# Altium PCB Simon Says.PcbDoc
Units mil, origin at the board's own origin, x right, y up, seen from the top; angles counter-clockwise.
Board outline 3149.61 x 1929.13 mil, 2 copper layers (Top Layer, Bottom Layer); 14 components, 13 nets, 74 pads, 1 vias.
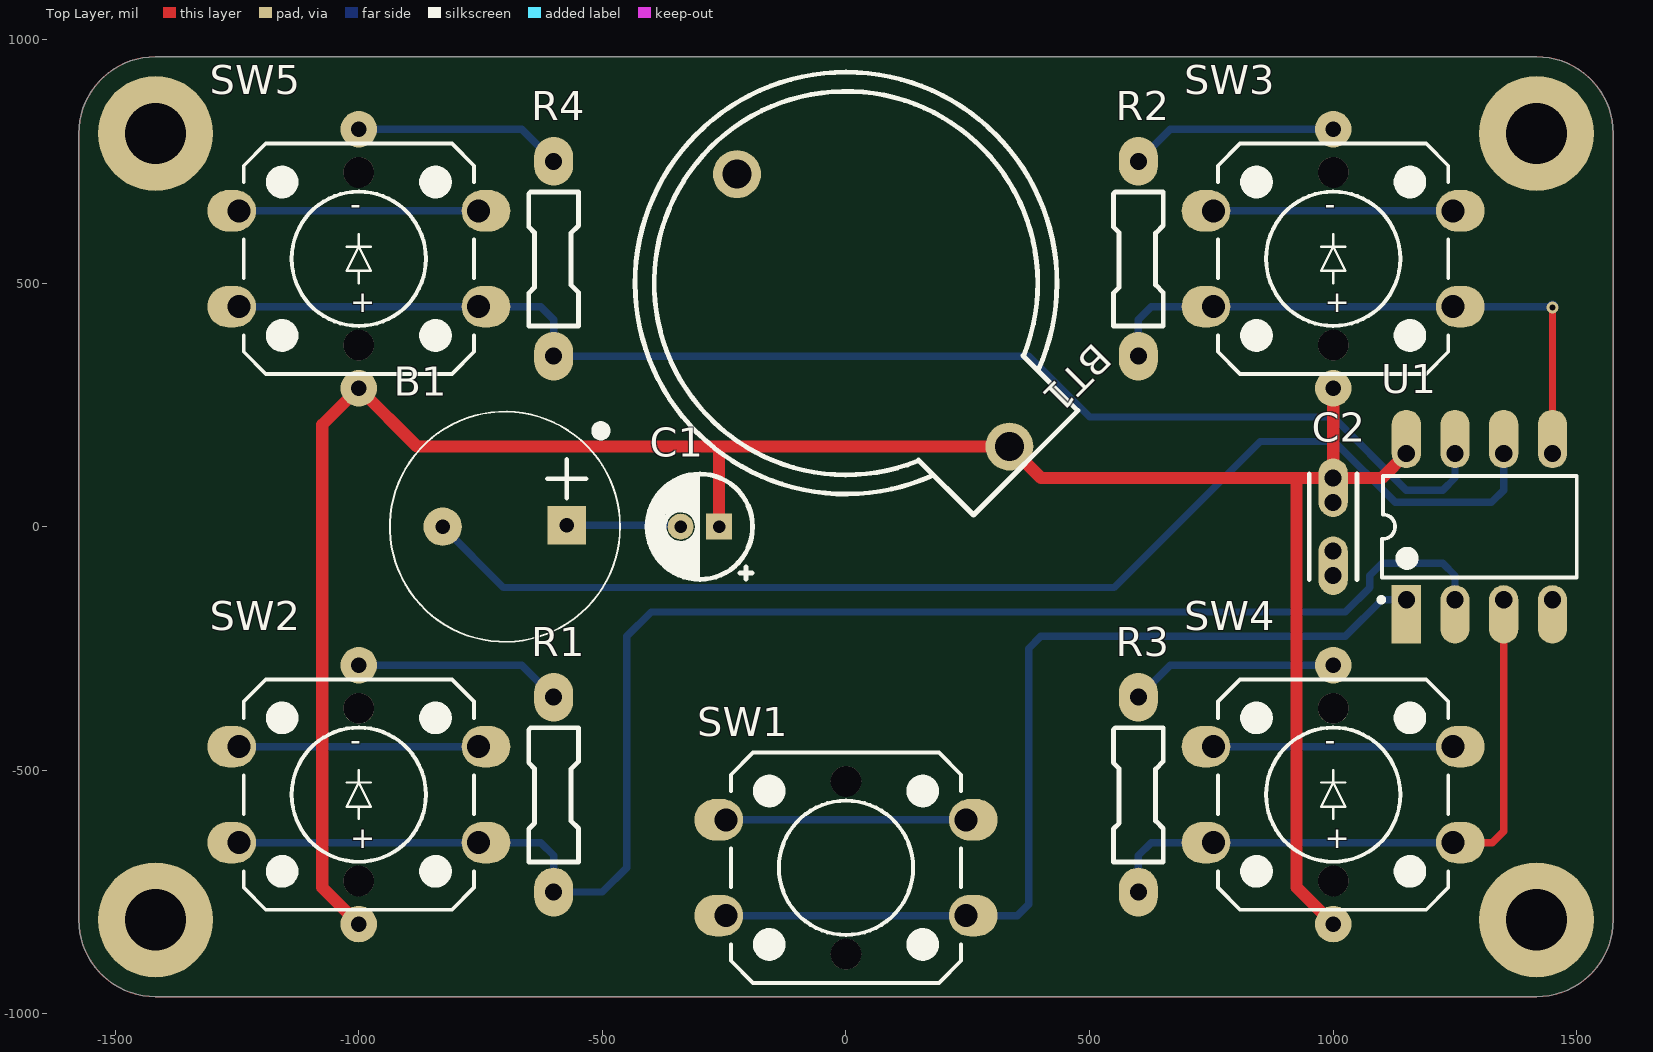
[diagram p0: Top Layer view]
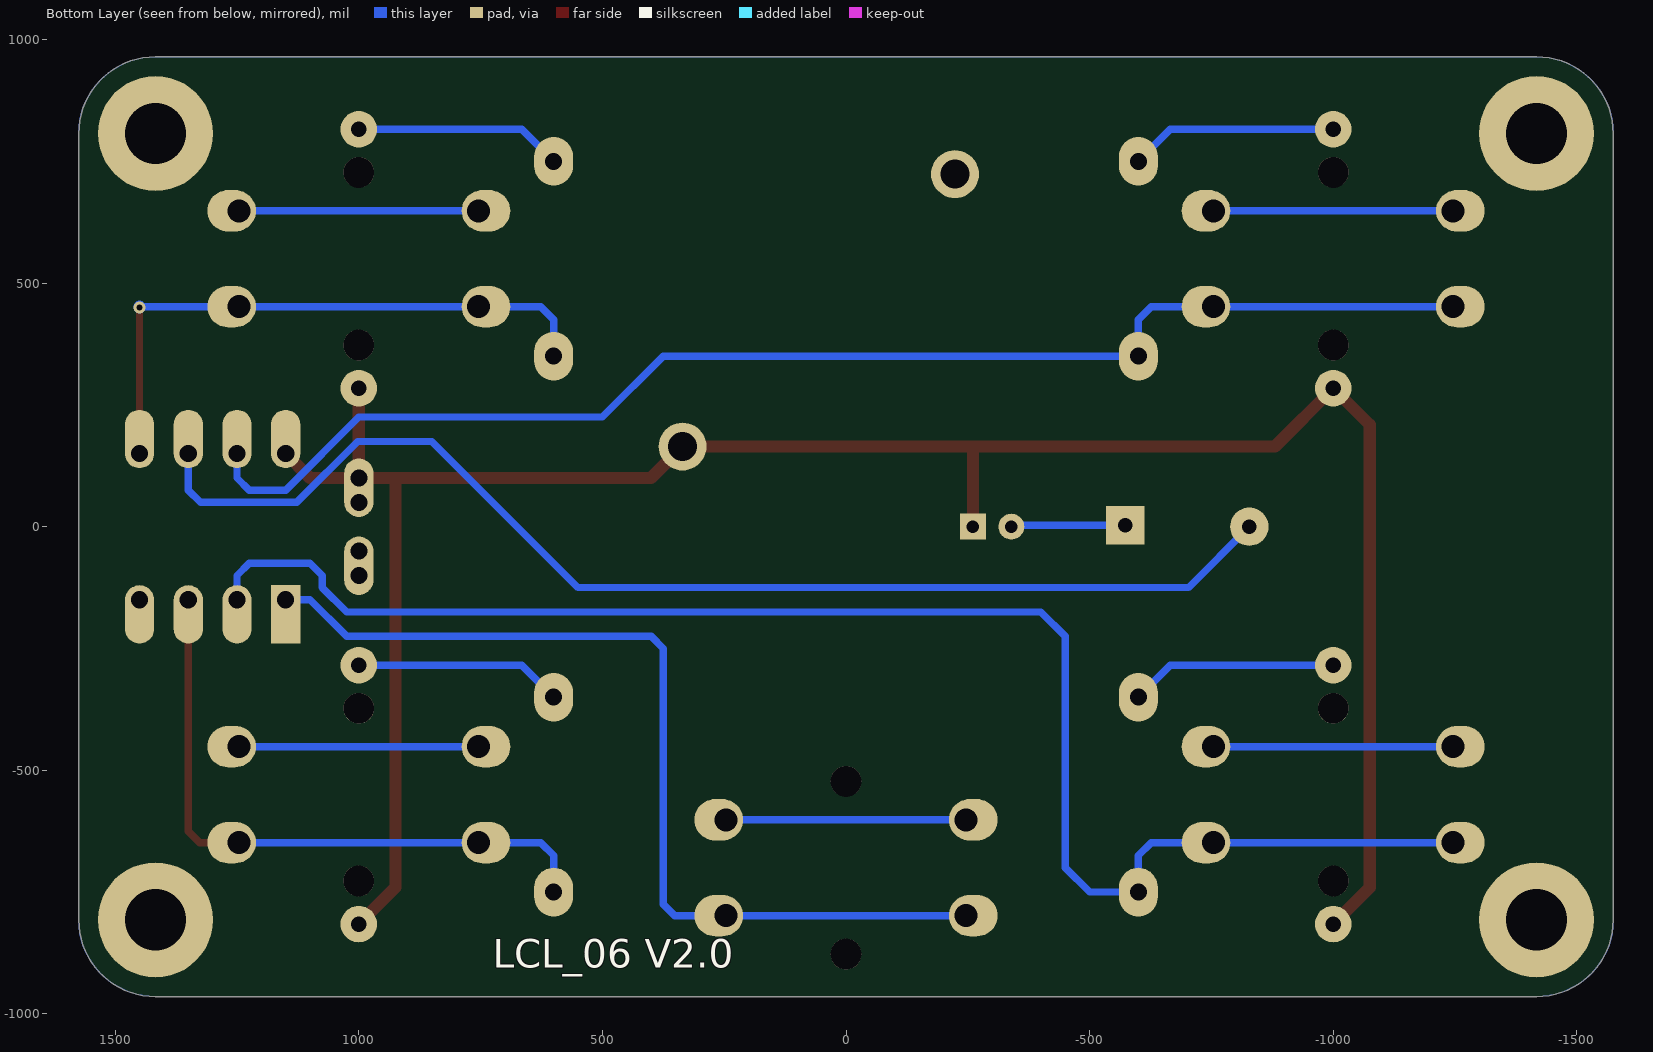
[diagram p1: Bottom Layer view, seen from below]

## Layer stack, top to bottom
Top Solder: solder mask 0.4, Solder Resist, Dk 3.5
Top Layer: signal copper 1.4
Dielectric 1: dielectric 12.6, FR-4, Dk 4.8
Bottom Layer: signal copper 1.4
Bottom Solder: solder mask 0.4, Solder Resist, Dk 3.5

## Board outline
-1574.8,-807.09 ccw(c-1417.32,-807.09) -1417.32,-964.57 1417.32,-964.57 ccw(c1417.32,-807.09) 1574.8,-807.09 1574.8,807.09 ccw(c1417.32,807.09) 1417.32,964.57 -1417.32,964.57 ccw(c-1417.32,807.09) -1574.8,807.09

## Design rules (kind name [scope] priority, off if disabled: settings)
AssemblyTestPointUsage AssemblyTestPointUsage_1 [All] p2:
AssemblyTestpoint AssemblyTestpoint_1 [All] p2: testpointundercomponent=TRUE minsize=40 maxsize=100 preferedsize=60 minholesize=0 maxholesize=40 preferedholesize=32 testpointgrid=1 usegrid=TRUE gridtolerance=0.01 allowsidetop=TRUE allowsidebottom=TRUE
Clearance [All] p1: gap=10 ignorepadtopadclearanceinfootprint=FALSE except(0: Arc-Hole Track-Hole SMDPad-Hole THPad-Hole Via-Hole Fill-Hole Poly-Hole Region-Hole Text-Hole)
Clearance 15 [All] p2: gap=10 ignorepadtopadclearanceinfootprint=FALSE except(0: Arc-Hole Track-Hole SMDPad-Hole THPad-Hole Via-Hole Fill-Hole Poly-Hole Region-Hole Text-Hole; 15: Arc-Poly Track-Poly SMDPad-Poly THPad-Poly Via-Poly Fill-Poly Poly-Poly)
ComponentClearance ComponentClearance_1 [All] p2: gap=10 collisioncheckmode=3 verticalgap=10 showdistances=FALSE
DiffPairsRouting DiffPairsRouting_1 [All] p2: maxlimit=10 minlimit=10 mostfreqgap=10 toplayer_minwidth=15 toplayer_maxwidth=15 toplayer_prefwidth=15 bottomlayer_minwidth=15 bottomlayer_maxwidth=15 bottomlayer_prefwidth=15 maxuncoupledlength=500
FabricationTestPointUsage FabricationTestPointUsage_1 [All] p2: valid=0 allowmultiple=FALSE
FabricationTestpoint FabricationTestpoint_1 [All] p2: side=3 testpointundercomponent=TRUE minsize=40 maxsize=100 preferedsize=60 minholesize=0 maxholesize=40 preferedholesize=32 testpointgrid=1 allowsidetop=TRUE allowsidebottom=TRUE usegrid=TRUE gridtolerance=0.01
FanoutControl Fanout_BGA_1 [IsBGA] p2: bgadir=Out bgaviamode=Centered fanoutstyle=Auto fanoutdirection=Alternating viagrid=1 // Fanout_BGA (Default Rule)
FanoutControl Fanout_LCC [IsLCC] p3: bgadir=Out bgaviamode=Centered fanoutstyle=Auto fanoutdirection=Alternating viagrid=1 // Fanout_LCC (Default Rule)
FanoutControl Fanout_LCC_1 [IsLCC] p4: bgadir=Out bgaviamode=Centered fanoutstyle=Auto fanoutdirection=Alternating viagrid=1 // Fanout_LCC (Default Rule)
FanoutControl Fanout_SOIC_1 [IsSOIC] p5: bgadir=Out bgaviamode=Centered fanoutstyle=Auto fanoutdirection=Alternating viagrid=1 // Fanout_SOIC (Default Rule)
FanoutControl Fanout_SOIC [IsSOIC] p6: bgadir=Out bgaviamode=Centered fanoutstyle=Auto fanoutdirection=Alternating viagrid=1 // Fanout_SOIC (Default Rule)
FanoutControl Fanout_Small_1 [(CompPinCount < 5)] p7: bgadir=Out bgaviamode=Centered fanoutstyle=Auto fanoutdirection=OutThenIn viagrid=1 // Fanout_Small (Default Rule)
FanoutControl Fanout_Small [(CompPinCount < 5)] p8: bgadir=Out bgaviamode=Centered fanoutstyle=Auto fanoutdirection=OutThenIn viagrid=1 // Fanout_Small (Default Rule)
FanoutControl Fanout_Default [All] p9: bgadir=Out bgaviamode=Centered fanoutstyle=Auto fanoutdirection=Alternating viagrid=1 // Fanout_Default (Default Rule)
FanoutControl Fanout_Default_1 [All] p10: bgadir=Out bgaviamode=Centered fanoutstyle=Auto fanoutdirection=Alternating viagrid=1 // Fanout_Default (Default Rule)
Height Height_1 [All] p2: minheight=0 maxheight=1000 prefheight=500
HoleSize HoleSize_1 [All] p2: absolutevalues=TRUE maxlimit=100 minlimit=1 maxpercent=80.000 minpercent=20.000
HoleToHoleClearance HoleToHoleClearance_1 [All] p2: gap=10 allowstackedmicrovias=TRUE
LayerPairs LayerPairs_1 [All] p2: enforce=TRUE
MinimumSolderMaskSliver [All] p1 off: minsoldermaskwidth=10
MinimumSolderMaskSliver MinimumSolderMaskSliver_1 [All] p2: minsoldermaskwidth=10
NetAntennae NetAntennae_1 [All] p2: netantennaetolerance=0
PasteMaskExpansion PasteMaskExpansion_1 [All] p2: expansion=0
PlaneClearance PlaneClearance_1 [All] p2: clearance=20
PlaneConnect PlaneConnect_1 [All] p2: planeconnectstyle=Relief reliefexpansion=20 reliefentries=4 reliefconductorwidth=10 reliefairgap=10
PolygonConnect [All] p1: connectstyle=Relief reliefconductorwidth=10 reliefentries=4 polygonreliefangle="90 Angle" airgapwidth=10
PolygonConnect PolygonConnect_1 [All] p2: connectstyle=Relief reliefconductorwidth=10 reliefentries=4 polygonreliefangle="90 Angle" airgapwidth=10
RoomDefinition "Simon Says" [InComponentClass('Simon Says')] p1: confinementstyle=ConfineIn formatcopy=TRUE lockcomponents=FALSE outline -1575,-975 1575,-975 1575,975 -1575,975
RoutingCorners RoutingCorners_1 [All] p2: cornerstyle=45-Degree minsetback=100 maxsetback=100
RoutingLayers RoutingLayers_1 [All] p2: top layer_v5=TRUE bottom layer_v5=TRUE
RoutingPriority RoutingPriority_1 [All] p2: routingpriority=0
RoutingTopology RoutingTopology_1 [All] p2: topology=Shortest
RoutingVias [All] p1: holewidth=12 width=24 viastyle="Through Hole" minholewidth=12 minwidth=24 maxholewidth=28 maxwidth=50
RoutingVias RoutingVias_1 [All] p2: holewidth=12 width=24 viastyle="Through Hole" minholewidth=12 minwidth=24 maxholewidth=28 maxwidth=50
ShortCircuit ShortCircuit_1 [All] p2: allowed=FALSE
SilkToBoardRegionClearance SilkToBoardRegionClearance_1 [All] p2:
SilkToSilkClearance [All] p1 off: silktosilkclearance=10
SilkToSilkClearance SilkToSilkClearance_1 [All] p2: silktosilkclearance=10
SilkToSolderMaskClearance [IsPad] p1 off: minsilkscreentomaskgap=10 clearancetoexposedcopper=TRUE
SilkToSolderMaskClearance SilkToSolderMaskClearance_1 [IsPad] p2: minsilkscreentomaskgap=10 clearancetoexposedcopper=TRUE
SolderMaskExpansion [All] p1: expansion=4
SolderMaskExpansion SolderMaskExpansion_1 [All] p2: expansion=4
UnRoutedNet UnRoutedNet_1 [All] p2:
UnpouredPolygon UnpouredPolygon_1 [All] p2:
Width [All] p1: maxlimit=250 minlimit=8 preferedwidth=10
Width Width_1 [All] p2: maxlimit=250 minlimit=6 preferedwidth=15
23 further rules are at their usual default settings.

## Components (designator, comment, footprint, x,y, rotation, side; value= is the part's Value field where it differs from the comment)
B1 "42R" BUZZER -700,0 r270 top
BT1 "CR2032 Battery Holder" "CR2032 HOLDER" 0,500 r315 top
C1 "10uF" "CAP ELECTRO 5mm" -300,0 r180 top
C2 "10nF" "CAP 0.100\"" 1000,0 r270 top
R1 "1k" "RESISTOR 0.400\"" -600,-550 r270 top
R2 "1k" "RESISTOR 0.400\"" 600,550 r270 top
R3 "1k" "RESISTOR 0.400\"" 600,-550 r270 top
R4 "1k" "RESISTOR 0.400\"" -600,550 r270 top
SW1 "12MM TACT SWITCH" "12mm TACT THROUGH HOLE" 0,-700 r0 top
SW2 "TACT RED" "ILLUMINATED TACT RED" -1000,-550 r0 top
SW3 "TACT ORANGE" "ILLUMINATED TACT ORANGE" 1000,550 r0 top
SW4 "TACT GREEN" "ILLUMINATED TACT GREEN" 1000,-550 r0 top
SW5 "TACT BLUE" "ILLUMINATED TACT BLUE" -1000,550 r0 top
U1 "ATTINY13-20SSU" DIP-8 1300,0 r90 top

## Footprints (in the part's own frame and the unit in brackets; to place one, negate y for a bottom-side part, rotate by r counter-clockwise, add the part's x,y. Pads: shape width x height; smd on the part's side, far side on the other; paste and mask are expansions set on the pad)
"12mm TACT THROUGH HOLE" [mil] "12mm TACT THROUGH HOLE"
  oval 100x85 hole 47.24 copper offset -15,0: 1(-246.06,98.43) 2(-246.06,-98.43)
  oval 100x85 hole 47.24 copper offset 15,0: 1(246.06,98.43) 2(246.06,-98.43)
  round 62.99 hole 62.99: MOUNT(0,-177.17) MOUNT(0,177.17)
  silkscreen extent -236,-236 236,236, body extent -273,-236 273,236, height 335
BUZZER [mm]
  rect 2x2 hole 0.762: 1(-0.079,3.223)
  round 2 hole 0.762: 2(0,-3.25)
  silkscreen extent -6,-6 6,6, body extent -6,-6 6,6, height 8.51
"CAP 0.100\"" [mil]
  round 60 hole 35: 1(-99.99,0) 2(100.01,0)
  oval 120x60 hole 35 copper offset -30,0: 1(-49.99,0)
  oval 120x60 hole 35 copper offset 30,0: 2(50.01,0)
  silkscreen extent -108,-49 108,49, body extent -108,-49 108,49, height 216
"CAP ELECTRO 5mm" [mm]
  rect 1.35x1.35 hole 0.65: 1(-1,0)
  round 1.35 hole 0.65: 2(1,0)
  silkscreen extent -2.75,-2.75 2.75,2.75, body extent -2.55,-2.64 2.58,2.49, height 5.03
"CR2032 HOLDER" [mm]
  round 2.5 hole 1.5: 1(12.05,0) 2(-8.035,0)
  silkscreen extent -11,-11 13.25,11, body extent -11.45,-11 13.05,11, height 8.51
DIP-8 [mil] "DIP, 14-Pin, Row Spacing 7.62 mm, Pitch 2.54 mm"
  rect 120x60 hole 35 copper offset -30,0: 1(-150,150)
  rrect100% 120x60 hole 35.43 copper offset -30,0: 2(-150,50) 3(-150,-50) 4(-150,-150)
  rrect100% 120x60 hole 35.43 copper offset 30,0: 5(150,-150) 6(150,-50) 7(150,50) 8(150,150)
  silkscreen extent -155,-200 104,206, body extent -155,-181 155,181, height 152
"ILLUMINATED TACT BLUE" [mil]
  oval 100x85 hole 47.24 copper offset -15,0: 1(-246.06,98.43) 2(-246.06,-98.43)
  oval 100x85 hole 47.24 copper offset 15,0: 1(246.06,98.43) 2(246.06,-98.43)
  round 75 hole 31.5: A(0,265.75) K(0,-265.75)
  round 62.99 hole 62.99: MOUNT(0,-177.17) MOUNT(0,177.17)
  silkscreen extent -236,-236 236,236, body extent -264,-298 264,298, height 290
"ILLUMINATED TACT GREEN" [mil]
  oval 100x85 hole 47.24 copper offset -15,0: 1(-246.06,98.43) 2(-246.06,-98.43)
  oval 100x85 hole 47.24 copper offset 15,0: 1(246.06,98.43) 2(246.06,-98.43)
  round 75 hole 31.5: A(0,265.75) K(0,-265.75)
  round 62.99 hole 62.99: MOUNT(0,-177.17) MOUNT(0,177.17)
  silkscreen extent -236,-236 236,236, body extent -264,-299 264,298, height 290
"ILLUMINATED TACT ORANGE" [mil]
  oval 100x85 hole 47.24 copper offset -15,0: 1(-246.06,98.43) 2(-246.06,-98.43)
  oval 100x85 hole 47.24 copper offset 15,0: 1(246.06,98.43) 2(246.06,-98.43)
  round 75 hole 31.5: A(0,265.75) K(0,-265.75)
  round 62.99 hole 62.99: MOUNT(0,-177.17) MOUNT(0,177.17)
  silkscreen extent -236,-236 236,236, body extent -264,-299 264,298, height 290
"ILLUMINATED TACT RED" [mil]
  oval 100x85 hole 47.24 copper offset -15,0: 1(-246.06,98.43) 2(-246.06,-98.43)
  oval 100x85 hole 47.24 copper offset 15,0: 1(246.06,98.43) 2(246.06,-98.43)
  round 75 hole 31.5: A(0,265.75) K(0,-265.75)
  round 62.99 hole 62.99: MOUNT(0,-177.17) MOUNT(0,177.17)
  silkscreen extent -236,-236 236,236, body extent -264,-299 264,298, height 290
"RESISTOR 0.400\"" [mil]
  oval 100x80 hole 35: 1(-200,0) 2(200,0)
  silkscreen extent -137,-51 138,51, body extent -212,-47 212,47, height 95

## Part data
B1: library part BUZZER
BT1: library part CMP-dvcba8mzfnv4aqscf1uc-2, "CR2032 Battery Holder, Through Hole, Horizontal Mount", CustomComponentID=dvcba8mzfnv4aqscf1uc
C1: library part CMP-su2zmkw1kc3z49ns9isd-1, "5mm Through Hole Electrolytic 2mm Pitch, 5mm height", CustomComponentID=su2zmkw1kc3z49ns9isd
C2: library part CMP-f9eb30fd1b76262c-1, "Capacitor, Ceramic, 10000pF, 50VDC, 20-% Tol, 20+% Tol, X7R-TC Code, -15, 15%-TC", Manufacturer Part Number=C315C103M5R5TA, Mounting Style="Through Hole", OctopartID=f9eb30fd1b76262c, Octopart URL=http://octopart.com/c315c103m5r5ta-kemet-1886203, RoHS=Compliant
R1 R2 R3 R4: library part CMP-iaxfckaaxq3jb0c9euu5-1, "RESISITOR THROUGH HOLE 1/4W", CustomComponentID=iaxfckaaxq3jb0c9euu5
SW2: "12mm TACT SWITCH RED"
SW3: "12mm TACT SWITCH ORANGE"
SW4: "12mm TACT SWITCH GREEN"
SW5: "ILLUMINATED 12MM TACT SWITCH (BLUE)", CustomComponentID=pjmxh7vitsno3jubi8oz
U1: "ATtiny Series 20 MHz 1 KB Flash 64 B SRAM 8-Bit Microcontroller - SOIC-8", Package="SO-8 Microchip", Availability=Unavailable, MF=Microchip, MP=ATTINY13-20SSU, Price=None, SnapEDA_Link=https://www.snapeda.com/parts/ATTINY13-20SSU/Microchip/view-part/?ref=snap
SW1: CustomComponentID=pjmxh7vitsno3jubi8oz

## Free pads (board coordinates)
  round 10 on Mech16: 1(5082.1,-3582.94) 1(5082.1,-3582.94) 1(5082.62,-3660.05) 1(5082.62,-3660.05) 1(5269.4,-3515.17) 1(5269.4,-3515.17)
  round 236.22 hole 125.98: MOUNT(-1417.32,-807.09) MOUNT(-1417.32,807.09) MOUNT(1417.32,-807.09) MOUNT(1417.32,807.09)

## Via types
v1: diameter 24, hole 12, Top Layer to Bottom Layer, 1 vias

## Nets (pads, with @x,y where several pads share a name; then routed paths per layer and width w, separated by ;. In a path a pad name is that pad's centre, name@x,y a point inside that pad or via, vN(x,y) a via of type N, cw(c..) or ccw(c..) an arc to the next point about the centre after c; other vN are vias at no path point)
BLUE: R4.2 SW5.2 U1.7 | length 2756.3
  Bottom Layer w15: SW5.2@-1246.06,451.57 -753.94,451.57 -626.57,451.57 -600,425 R4.2 375,350 500,225 1000,225 1150,75 1225,75 1250,100 U1.7
BUZZER: B1.2 U1.6 | length 2491.1
  Bottom Layer w15: B1.2 -702.96,-125 550,-125 850,175 1002.17,175 1127.17,50 1325,50 1350,75 U1.6
GND: BT1.2 C2.2 SW1.1 SW2.1 SW3.1 SW4.1 SW5.1 U1.4 | length 2460.6
  Bottom Layer w15: SW2.1@-1246.06,-451.57 SW2.1@-753.94,-451.57 ; SW5.1@-1246.06,648.43 SW5.1@-753.94,648.43 ; SW1.1@-246.06,-601.57 SW1.1@246.06,-601.57 ; SW4.1@753.94,-451.57 SW4.1@1246.06,-451.57 ; SW3.1@753.94,648.43 SW3.1@1246.06,648.43
GREEN: R3.2 SW4.2 U1.3 | length 1320.7
  Top Layer w15: SW4.2@1246.06,-648.43 1326.57,-648.43 1350,-625 U1.3
  Bottom Layer w15: R3.2 600,-675 626.57,-648.43 753.94,-648.43 SW4.2@1246.06,-648.43
NetB1_1: B1.1 C1.2 | length 235
  Bottom Layer w15: B1.1 -342.47,3.1 C1.2
NetR1_1: R1.1 SW2.A | length 427.2
  Bottom Layer w15: SW2.A -665.75,-284.25 R1.1
NetR2_1: R2.1 SW3.A | length 427.2
  Bottom Layer w15: R2.1 665.75,815.75 SW3.A
NetR3_1: R3.1 SW4.A | length 427.2
  Bottom Layer w15: R3.1 665.75,-284.25 SW4.A
NetR4_1: R4.1 SW5.A | length 427.2
  Bottom Layer w15: SW5.A -665.75,815.75 R4.1
ORANGE: R2.2 SW3.2 U1.5 | length 1237.6
  Top Layer w15: U1.5 v1(1450,450)
  Bottom Layer w15: R2.2 600,425 626.57,451.57 753.94,451.57 1246.06,451.57 v1@1450,451.57
  Bottom Layer w25: v1(1450,450) v1@1450,451.57
RED: R1.2 SW2.2 U1.2 | length 3214.9
  Bottom Layer w15: SW2.2@-1246.06,-648.43 -753.94,-648.43 -626.57,-648.43 -600,-675 R1.2 -500,-750 -450,-700 -450,-225 -400,-175 1025,-175 1075,-125 1075,-100 1100,-75 1225,-75 1250,-100 U1.2
START: SW1.2 U1.1 | length 1972.2
  Bottom Layer w15: SW1.2@-246.06,-798.43 246.06,-798.43 351.57,-798.43 375,-775 375,-250 400,-225 1025,-225 1100,-150 U1.1
VCC: BT1.1 C1.1 C2.1 SW2.K SW3.K SW4.K SW5.K U1.8 | length 4719.2
  Top Layer w25: SW2.K -1075,-740.74 -1075,209.25 SW5.K -880.29,164.54 BT1.1 400,100 925,100 ; C1.1 -260.63,153.91 ; SW4.K 925,-740.74 925,100 ; SW3.K C2.1@1000,99.99 ; U1.8 1099.99,99.99 C2.1@1000,99.99 ; 925,100 974.99,100 C2.1@1000,99.99
  Bottom Layer w25: U1.8 U1.8@1150,175
pads on no net: SW1.MOUNT SW2.MOUNT SW3.MOUNT SW4.MOUNT SW5.MOUNT

## Polygon pours and split planes (outlines as drawn)
no net on Top Layer "TOP GROUND" (solid, remove dead copper, shelved, pour order 9): -1574.8,-807.09 ccw(c-1417.32,-807.09) -1417.32,-964.57 1417.32,-964.57 ccw(c1417.32,-807.09) 1574.8,-807.09 1574.8,807.09 ccw(c1417.32,807.09) 1417.32,964.57 -1417.32,964.57 ccw(c-1417.32,807.09) -1574.8,807.09
GND on Top Layer "TOP GND" (solid, remove dead copper, shelved, pour order 10): -1574.8,-807.09 ccw(c-1417.32,-807.09) -1417.32,-964.57 1417.32,-964.57 ccw(c1417.32,-807.09) 1574.8,-807.09 1574.8,807.09 ccw(c1417.32,807.09) 1417.32,964.57 -1417.32,964.57 ccw(c-1417.32,807.09) -1574.8,807.09
no net on Bottom Layer "BOTTOM GND" (solid, remove dead copper, shelved, pour order 12): -1574.8,-807.09 ccw(c-1417.32,-807.09) -1417.32,-964.57 1417.32,-964.57 ccw(c1417.32,-807.09) 1574.8,-807.09 1574.8,807.09 ccw(c1417.32,807.09) 1417.32,964.57 -1417.32,964.57 ccw(c-1417.32,807.09) -1574.8,807.09
GND on Bottom Layer "BOTTOM" (solid, shelved, pour order 11): -1574.8,-807.09 ccw(c-1417.32,-807.09) -1417.32,-964.57 1417.32,-964.57 ccw(c1417.32,-807.09) 1574.8,-807.09 1574.8,807.09 ccw(c1417.32,807.09) 1417.32,964.57 -1417.32,964.57 ccw(c-1417.32,807.09) -1574.8,807.09

## Silkscreen, mask and mechanical layers (free items; w line width, h text height)
Top Overlay:
  drawing of 3736 lines, arcs and shapes, not listed
  text "SIMON SAYS" at 2150,-125 h200
  text "www.lowcostlabs.com.au" at 2175,-525 h200
  text "⋱" at 1175,-1475 h600
  text "S" at -1525,-1775 h250
  text "LOW COST LABS" at 437.13,-1970 h60
Bottom Overlay:
  text "LCL_06 V2.0" at 725,-925 h100
  text "S" at -100,-1300 h250
Mechanical 1:
  the board outline again, w10
Mechanical 32:
  drawing of 655 lines, arcs and shapes, not listed
  text "1" at -4645.67,3996.06 h100
  text "2" at -1377.95,3996.06 h100
  text "3" at 1574.8,3996.06 h100
  text "4" at 4389.76,3996.06 h100
  text "A" at -5767.72,3090.55 h100
  text "A" at 5728.35,3090.55 h100
  text "B" at -5787.4,1003.94 h100
  text "B" at 5708.66,1003.94 h100
  text "C" at -5767.72,-1122.05 h100
  text "C" at 5728.35,-1122.05 h100
  text "D" at -5767.72,-3248.03 h100
  text "D" at 5728.35,-3248.03 h100
  text "LOW COST LABS" at 2696.85,-3307.09 h100
  text "TITLE: LED Color Mixer" at 1377.95,-3523.62 h100
  text "ludzinc.blogspot.com.au" at 3725,-3550 h100
  text "SIZE: A4" at 1377.95,-3700.79 h100
  text "Number: LCL_006" at 2204.72,-3700.79 h100
  text "Revison 2.00" at 2992.13,-3700.79 h100
  text "www.lowcostlabs.com.au" at 3740.16,-3700.79 h100
  text "DATE:" at 1377.95,-3818.9 h100
  text ".Print_Date" at 1614.17,-3818.9 h100
  text "SHEET 1 of 1" at 2992.13,-3818.9 h100
  text "FILE:" at 1377.95,-3917.32 h100
  text ".Pcb_File_Name" at 1614.17,-3917.32 h100
  text "S" at -5649.61,-3937.01 h100
  text "1" at -4645.67,-4055.12 h100
  text "2" at -1377.95,-4055.12 h100
  text "3" at 1574.8,-4055.12 h100
  text "4" at 4389.76,-4055.12 h100

## Text inside footprints (layer, text, board x,y; h text height)
SW2: Top Overlay "+" at -1017.5,-675 h77.5; Top Overlay "-" at -1017.5,-475 h77.5
SW3: Top Overlay "-" at 982.5,625 h77.5; Top Overlay "+" at 982.5,425 h77.5
SW4: Top Overlay "-" at 982.5,-475 h77.5; Top Overlay "+" at 982.5,-675 h77.5
SW5: Top Overlay "-" at -1017.5,625 h77.5; Top Overlay "+" at -1017.5,425 h77.5